# Altium PCB MB1419.PcbDoc (part 1 of 2)
Units mil, origin at the board's own origin, x right, y up, seen from the top; angles counter-clockwise.
Board outline 787.48 x 1614.17 mil, 4 copper layers (Top Layer, Signal Layer 3, Signal Layer 4, Bottom Layer), stack 43.307 mil thick; 117 components, 71 nets, 371 pads, 280 vias.
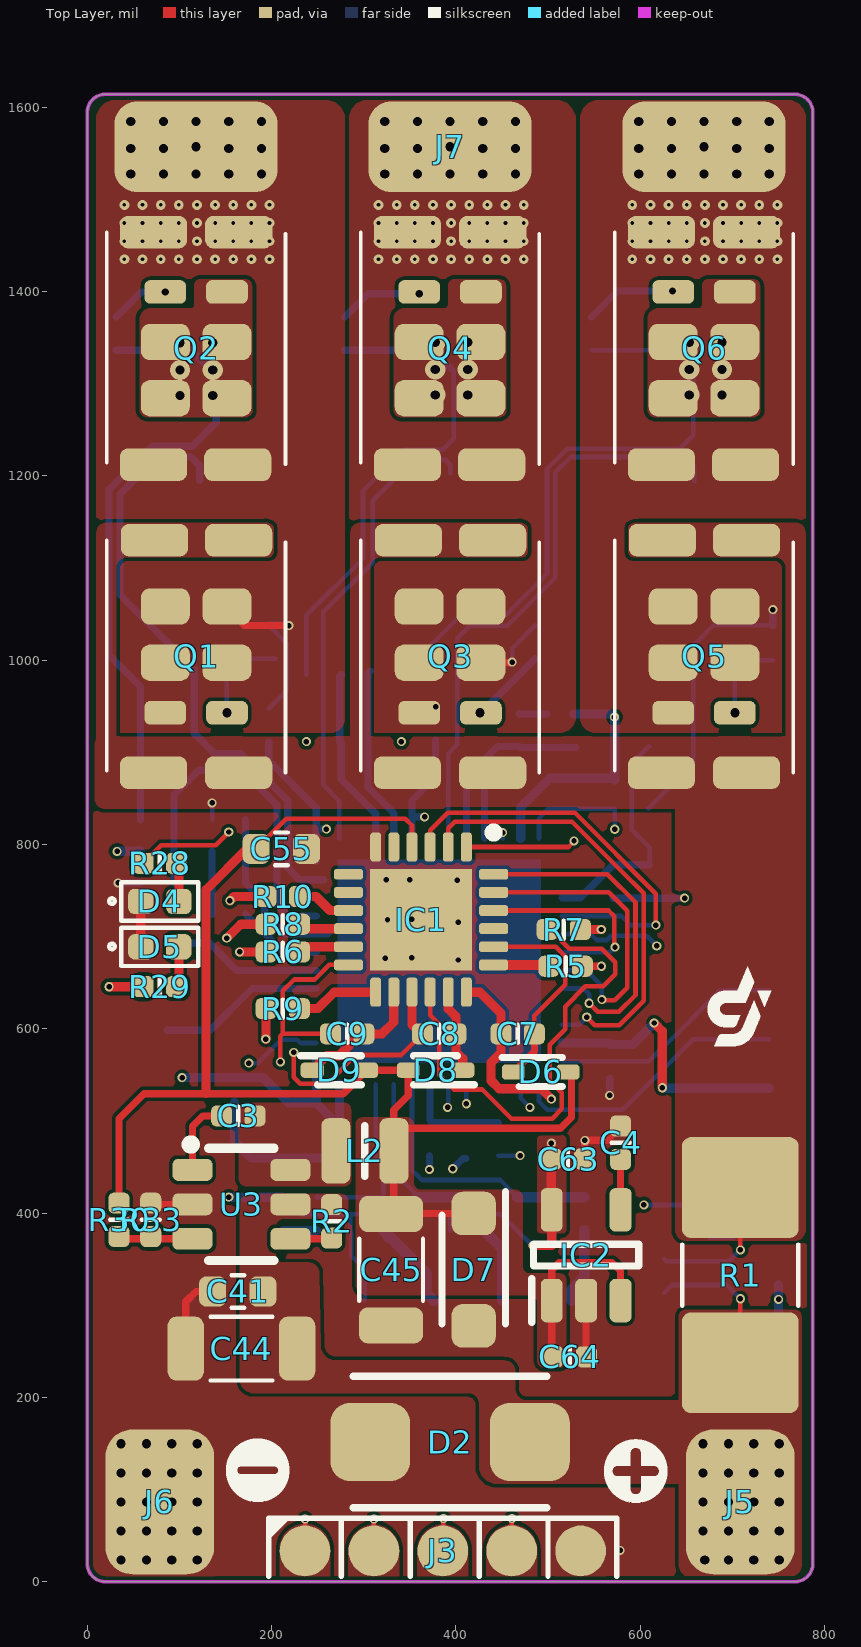
[diagram p0: Top Layer view]
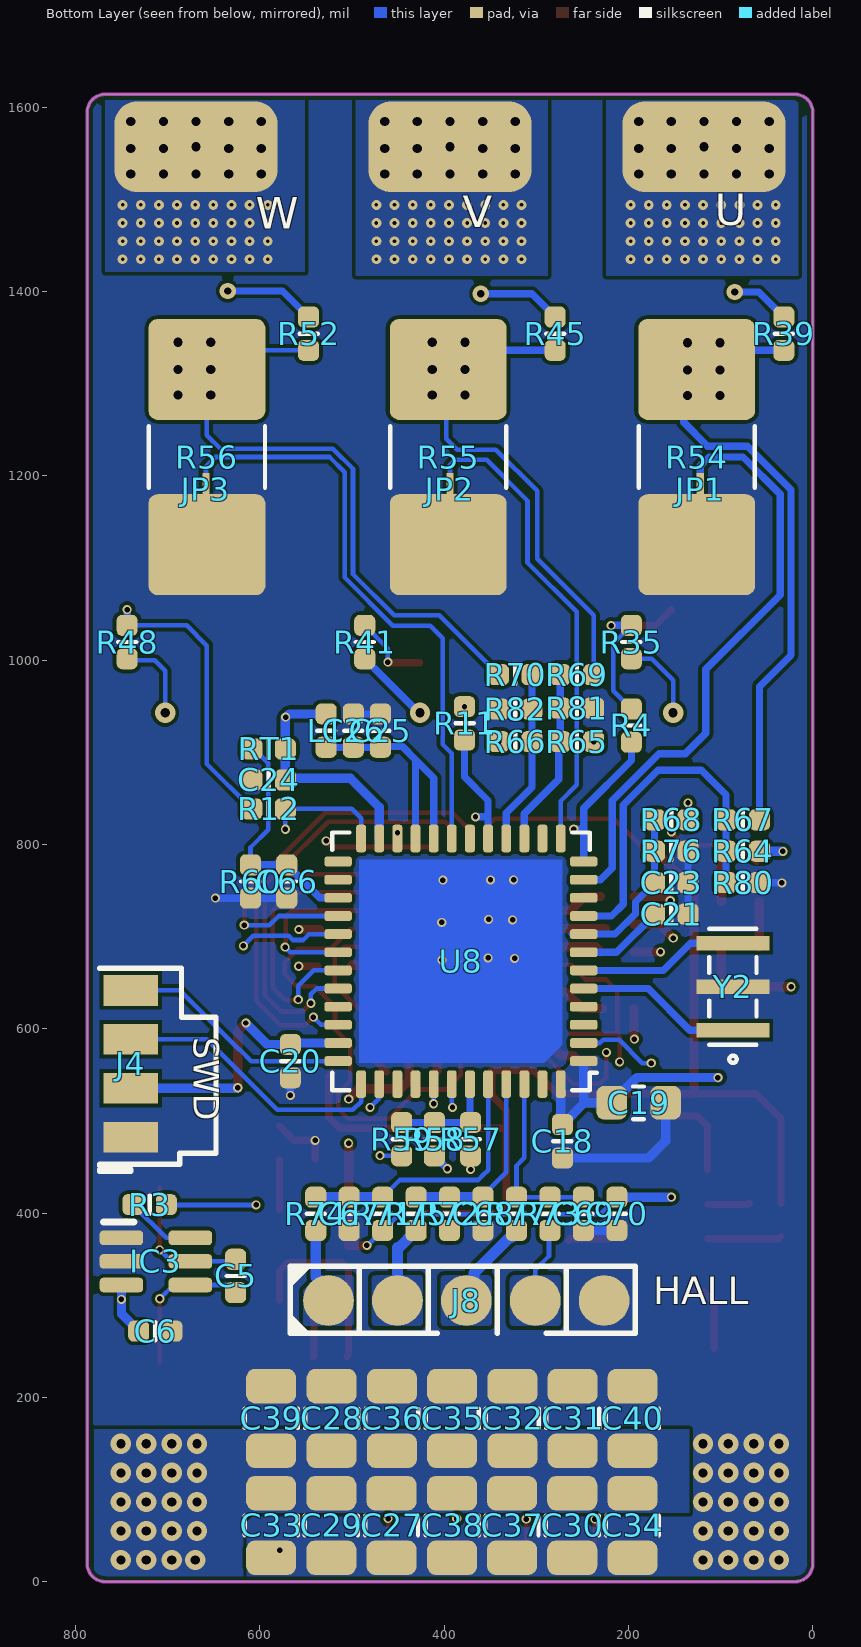
[diagram p1: Bottom Layer view, seen from below]
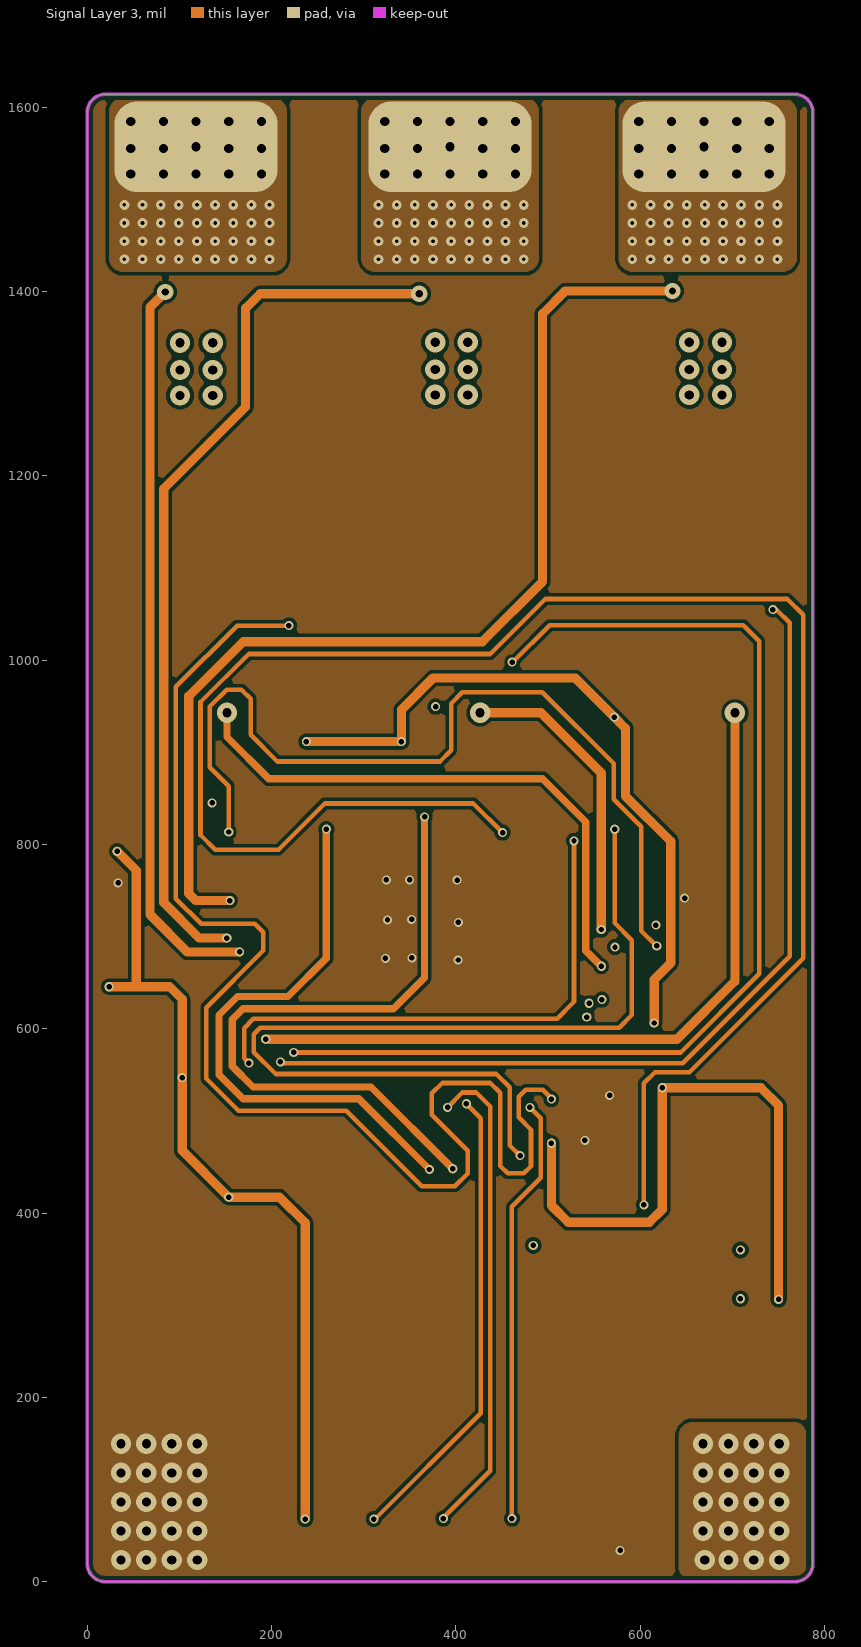
[diagram p2: Signal Layer 3]
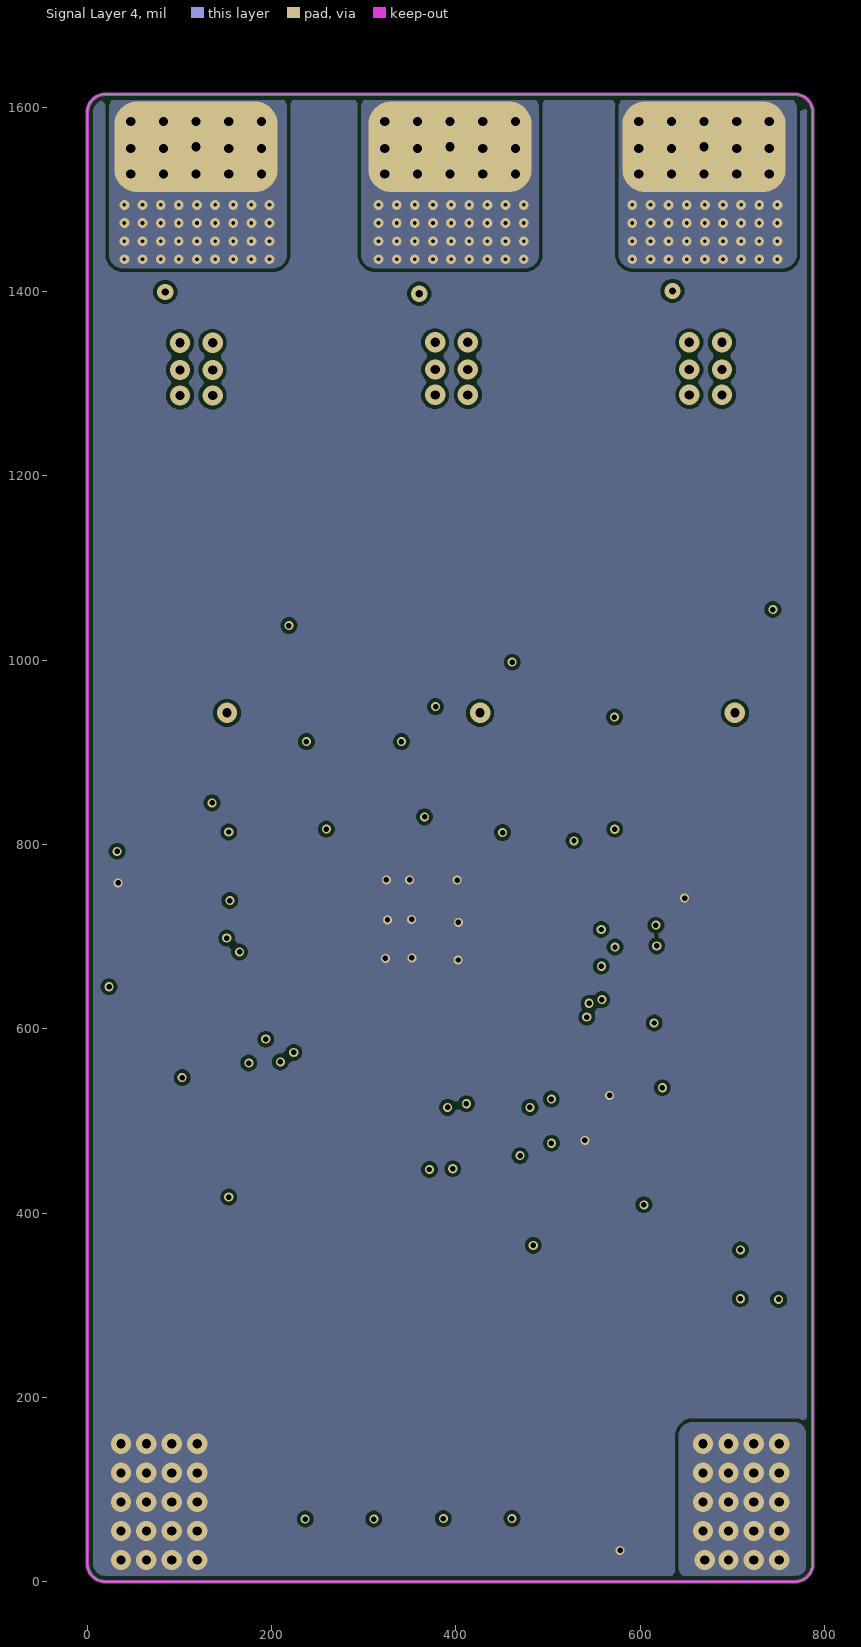
[diagram p3: Signal Layer 4]
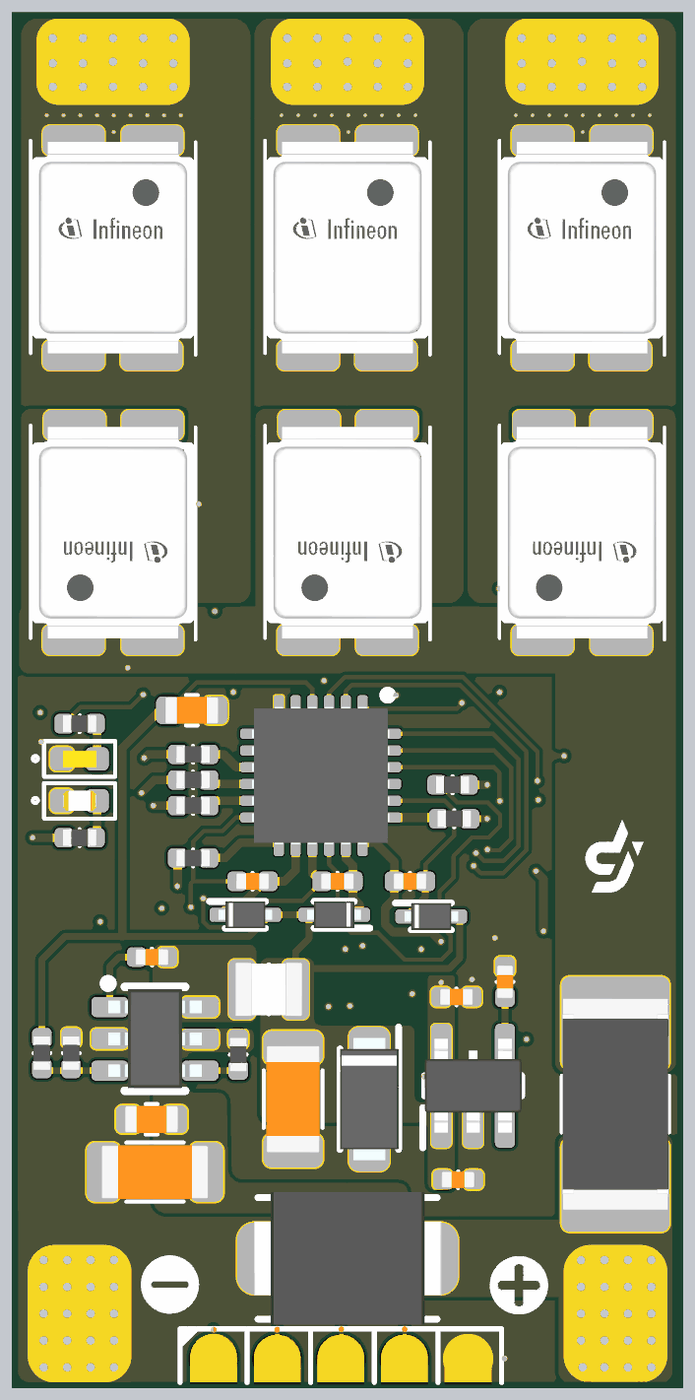
[diagram p5: 3D render of the assembled board from above, using the file's embedded part models]
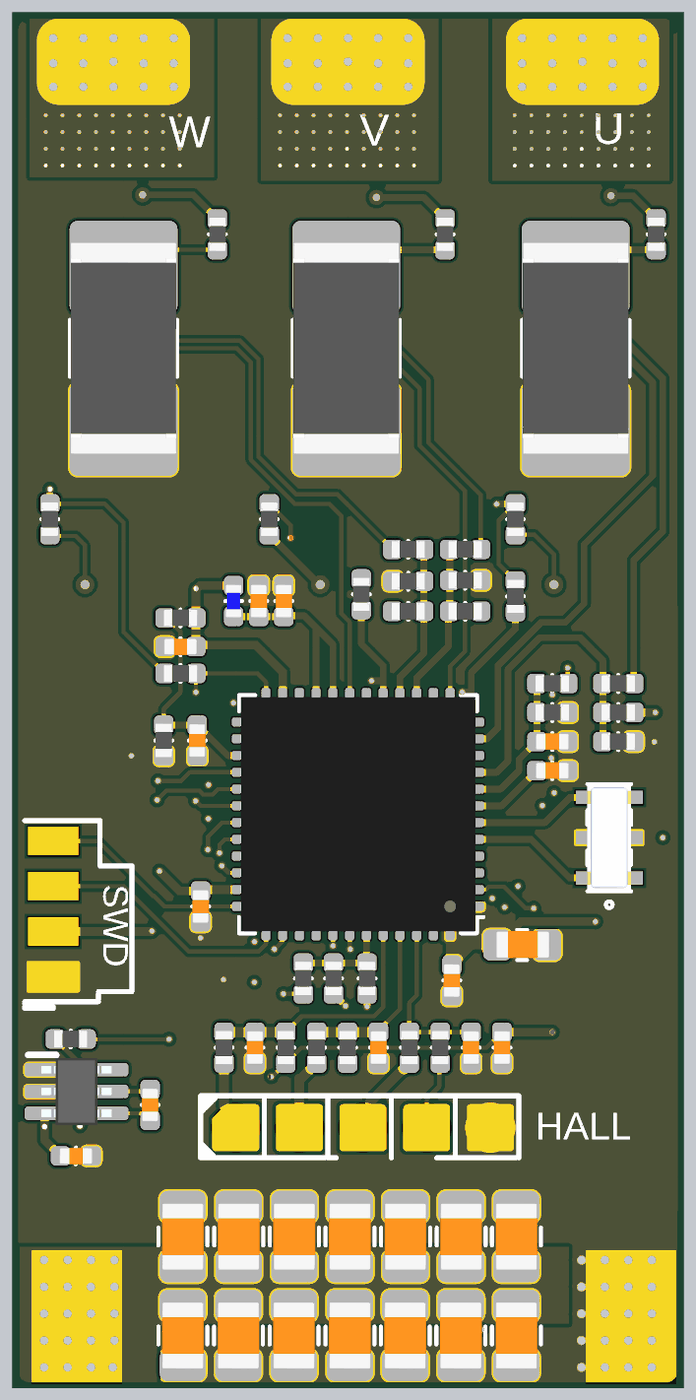
[diagram p6: 3D render of the assembled board from below, using the file's embedded part models]

## Layer stack, top to bottom
Top Solder: solder mask 0.4, Solder Resist, Dk 3.5
Top Layer: signal copper 1.378
Dielectric 1: prepreg 7.0866, Dk 4.5
Signal Layer 3: signal copper 1.378
Dielectric 2: core 23.622, Dk 4.5
Signal Layer 4: signal copper 1.378
Dielectric 3: prepreg 7.0866, Dk 4.5
Bottom Layer: signal copper 1.378
Bottom Solder: solder mask 0.4, Solder Resist, Dk 3.5

## Board outline
0,19.68 0,206.69 -0.07,206.69 -0.07,918.31 0,917.32 0,1594.49 cw(c19.68,1594.49) 19.69,1614.17 767.72,1614.17 cw(c767.72,1594.49) 787.4,1594.49 787.4,19.69 cw(c767.72,19.68) 767.72,0 19.69,0 cw(c19.69,19.68)

## Design rules (kind name [scope] priority, off if disabled: settings)
Clearance Clearance_2 [(ObjectKind = 'Component') And (Name = 'R1')] p1: gap=10 ignorepadtopadclearanceinfootprint=FALSE except(0: Arc-Hole Track-Hole SMDPad-Hole THPad-Hole Via-Hole Fill-Hole Poly-Hole Region-Hole Text-Hole)
Clearance Clearance_1 [(ObjectKind = 'Component') And (Name = 'R1')] p2: gap=10 ignorepadtopadclearanceinfootprint=FALSE except(0: Arc-Hole Track-Hole SMDPad-Hole THPad-Hole Via-Hole Fill-Hole Poly-Hole Region-Hole Text-Hole)
Clearance Clearance_J2 [(ObjectKind = 'Pad') And (Name = 'J2-1') vs InPolygon] p3: gap=11.81 ignorepadtopadclearanceinfootprint=FALSE
Clearance [All] p4: gap=3.94 ignorepadtopadclearanceinfootprint=FALSE
ComponentClearance [All] p1: gap=0 collisioncheckmode=3 verticalgap=0 showdistances=FALSE
HoleToHoleClearance [All] p1: gap=5.91 allowstackedmicrovias=TRUE
MinimumSolderMaskSliver [All] p1: minsoldermaskwidth=3.94
PolygonConnect [All] p1: connectstyle=Direct reliefconductorwidth=10 reliefentries=4 polygonreliefangle="90 Angle" airgapwidth=10
RoutingVias [All] p1: holewidth=5.91 width=9.84 viastyle="Through Hole" minholewidth=3.94 minwidth=8.66 maxholewidth=19.68 maxwidth=27.56
ShortCircuit ShortCircuit_JP1-JP3 [InComponent('JP1', 'JP2', 'JP3') vs InComponent('JP1', 'JP2', 'JP3')] p1: allowed=TRUE
ShortCircuit [All] p2: allowed=FALSE
SolderMaskExpansion [All] p1: expansion=1.5 istentingtop=FALSE
Width [All] p1: maxlimit=196.85 minlimit=4 preferedwidth=7.87
26 further rules are at their usual default settings.

## Classes and differential pairs
component class SENSING: C66 C67 C68 C69 C70 J8 R4 R11 R12 R57 R58 R59 R60 R64 R65 R66 R67 R68 R69 R70 R71 R72 R73 R74 R75 R76 R77 R80 R81 R82 RT1
component class "POWER STAGE": C3 C4 C5 C6 C7 C8 C9 C27 C28 C29 C30 C31 C32 C33 C34 C35 C36 C37 C38 C39 C40 C41 C44 C45 C55 C63 C64 D2 D6 D7 D8 D9 IC1 IC2 IC3 J5 J6 J7 JP1 JP2 JP3 L2 Q1 Q2 Q3 Q4 Q5 Q6 R1 R2 R3 R5 R6 R7 R8 R9 R10 R30 R33 R35 R39 R41 R45 R48 R52 R54 R55 R56 U3
component class MCU: C18 C19 C20 C21 C23 C24 C25 C26 D4 D5 J3 J4 L1 R28 R29 U8 Y2

## Components (designator, comment, footprint, x,y, rotation, side; value= is the part's Value field where it differs from the comment)
C3 "100nf" C_0402 163.9,505.51 r180 top
C4 "1uF" C_0402 578.77,476.38 r90 top
C5 "1nF" C_0402 626.23,331.83 r90 bottom
C6 "100nF" C_0402 713.43,271.91 r0 bottom
C7 "1uF" C_0402 467.09,594.49 r180 top
C8 "1uF" C_0402 381.89,594.49 r180 top
C9 "1uF" C_0402 282.07,594.49 r180 top
C18 "0.1uF" C_0402 271.65,477.95 r270 bottom
C19 "4.7uF" C_0603 188.98,519.68 r0 bottom
C20 "0.1uF" C_0402 566.93,564.9 r270 bottom
C21 "0.1uF" C_0402 153.54,724.41 r180 bottom
C23 "0.1uF" C_0402 153.54,758.53 r180 bottom
C24 "0.1uF" C_0402 590.55,870.08 r0 bottom
C25 "1uF" C_0402 469.14,923.62 r90 bottom
C26 "10nf" C_0402 498.59,923.62 r90 bottom
C27 "15uF" C_0805_HD 457.09,61.02 r90 bottom
C28 "15uF" C_0805_HD 522.07,177.17 r270 bottom
C29 "15uF" C_0805_HD 522.44,61.02 r90 bottom
C30 "15uF" C_0805_HD 261.02,61.02 r90 bottom
C31 "15uF" C_0805_HD 260.65,177.17 r270 bottom
C32 "15uF" C_0805_HD 326.01,177.17 r270 bottom
C33 "15uF" C_0805_HD 587.8,61.02 r90 bottom
C34 "15uF" C_0805_HD 195.67,61.02 r90 bottom
C35 "15uF" C_0805_HD 391.36,177.17 r270 bottom
C36 "15uF" C_0805_HD 456.72,177.17 r270 bottom
C37 "15uF" C_0805_HD 326.38,61.02 r90 bottom
C38 "15uF" C_0805_HD 391.36,61.02 r90 bottom
C39 "15uF" C_0805_HD 587.8,177.17 r270 bottom
C40 "15uF" C_0805_HD 195.67,177.17 r270 bottom
C41 "0.22uF" C_0603_HD 163.39,314.96 r180 top
C44 "10uF" C_1206 167.32,252.95 r180 top
C45 "22uF" C_1206 329.72,338.58 r90 top
C55 "470nF" C_0603_HD 210.63,795.28 r0 top
C63 "1uF" C_0402 521.69,458.66 r0 top
C64 "2.2uF" C_0402 523.62,244.09 r0 top
C66 "10nf" C_0402 570.87,759.84 r270 bottom
C67 "10pF" C_0402 503.06,399.15 r270 bottom
C68 "10pF" C_0402 357.83,399.15 r270 bottom
C69 "10pF" C_0402 248.91,399.15 r270 bottom
C70 "0.1uF" C_0402 212.6,399.15 r270 bottom
D2 "SMBJ30CA" SMBJ50CA 393.7,151.56 r180 top
D4 "LED RED" D_0402_Led_red 78.74,738.19 r0 top
D5 "LNJ347W83RA" D_0402_Led_green 78.74,688.98 r0 top
D6 "SD103AX" SODFL1608X70N 492.11,553.13 r0 top
D7 "SMF8.0A" SODFL3618X108N 419.27,338.6 r270 top
D8 "SD103AX" SODFL1608X70N 377.97,555.13 r180 top
D9 "SD103AX" SODFL1608X70N 273.61,555.1 r0 top
IC1 "FD6288Q" QFN50P400X400X90-25N-D 362.19,718.52 r270 top
IC2 "AP2210K-3.3TRG1" SOT95P280X145-5N 541.34,354.33 r90 top
IC3 "INA199A1DCKR" SOT65P210X110-6N 712.84,347.57 r180 bottom
J3 "PWM" SOLDER_PAD_5PIN_SMD 236.22,33.46 r0 top
J4 "SWD-PAD" SOLDER_PAD_4PIN_rect_SMD 740.16,641.73 r270 bottom
J5 "CON1" wire1_220s 708.66,86.61 r0 top
J6 "CON1" wire1_220s 78.74,86.61 r0 top
J7 "Motor" CONN_MOTOR_OUT 393.7,1557.09 r180 top locked
J8 "SOLDER PAD" SOLDER_PAD_5PIN_SMD 525.59,305.12 r180 bottom
JP1 "Short" SHORT 122.05,1185.17 r270 bottom
JP2 "Short" SHORT 393.7,1185.17 r270 bottom
JP3 "Short" SHORT 658.48,1185.17 r270 bottom
L1 "600 Ohms@100MHz" L_0402 528.04,923.62 r90 bottom
L2 "6.8uH" LQM2MPN1R0NG0L 301.18,467.52 r0 top
Q1 "IRF7480MTRPBF" IRF7480MTRPBF 118.11,1003.94 r90 top locked
Q2 "IRF7480MTRPBF" IRF7480MTRPBF 118.11,1338.58 r270 top locked
Q3 "IRF7480MTRPBF" IRF7480MTRPBF 393.7,1003.94 r90 top locked
Q4 "IRF7480MTRPBF" IRF7480MTRPBF 393.7,1338.58 r270 top locked
Q5 "IRF7480MTRPBF" IRF7480MTRPBF 669.29,1003.94 r90 top locked
Q6 "IRF7480MTRPBF" IRF7480MTRPBF 669.29,1338.58 r270 top locked
R1 "0.003" resc635x300x60l193n 708.64,332.66 r90 top
R2 "100k" R_0402 265.22,390.99 r90 top
R3 "56Ω" R_0402 719.64,409.2 r0 bottom
R4 "10k" R_0402 196.85,929.13 r90 bottom
R5 "33" R_0402 519.1,667.86 r0 top
R6 "33" R_0402 212.2,683.43 r180 top
R7 "33" R_0402 517.16,707.75 r0 top
R8 "33" R_0402 212.2,713.47 r180 top
R9 "33" R_0402 212.2,621.89 r180 top
R10 "33" R_0402 212.2,743.51 r180 top
R11 "10k" R_0402 377.95,931.5 r90 bottom
R12 "10k" R_0402 590.55,838.58 r0 bottom
R28 "510" R_0402 78.74,779.53 r0 top
R29 "510" R_0402 78.74,645.67 r0 top
R30 "90.9K" R_0402 34.45,392.72 r270 top
R33 "10k" R_0402 68.9,392.72 r270 top
R35 "10K" R_0402 196.85,1019.68 r90 bottom
R39 "10K" R_0402 31.5,1354.33 r270 bottom
R41 "10K" R_0402 486.22,1019.68 r90 bottom
R45 "10K" R_0402 279.53,1354.33 r270 bottom
R48 "10K" R_0402 744.09,1019.68 r90 bottom
R52 "10K" R_0402 547.24,1354.33 r270 bottom
R54 "0.003" resc635x300x60l193n 125.98,1220.47 r270 bottom
R55 "0.003" resc635x300x60l193n 395.67,1220.47 r270 bottom
R56 "0.003" resc635x300x60l193n 657.48,1220.47 r270 bottom
R57 "2.2k" R_0402 371.33,480.32 r90 bottom
R58 "2.2k" R_0402 410.7,480.32 r90 bottom
R59 "2.2k" R_0402 446.13,480.32 r90 bottom
R60 "4.7K" R_0402 610.24,759.84 r270 bottom
R64 "22k" r_0402 75.97,792.65 r180 bottom
R65 "22k" r_0402 255.91,911.63 r180 bottom
R66 "22k" r_0402 322.83,911.63 r0 bottom
R67 "1.5k" R_0402 75.97,826.77 r180 bottom
R68 "169k" R_0402 153.54,826.77 r0 bottom
R69 "1.5k" R_0402 255.91,984.25 r180 bottom
R70 "1.5k" R_0402 322.83,984.25 r0 bottom
R71 "10K" R_0402 466.75,399.15 r90 bottom
R72 "10K" R_0402 394.14,399.15 r90 bottom
R73 "10K" R_0402 285.21,399.15 r270 bottom
R74 "1.8k" R_0402 539.37,399.15 r90 bottom
R75 "1.8k" R_0402 430.45,399.15 r90 bottom
R76 "18k" R_0402 153.54,792.65 r180 bottom
R77 "1.8k" R_0402 321.52,399.15 r270 bottom
R80 "2.2k" R_0402 75.97,758.53 r0 bottom
R81 "2.2k" R_0402 255.91,947.94 r0 bottom
R82 "2.2k" R_0402 322.83,946.85 r180 bottom
RT1 "10K" R_0402 590.55,903.72 r0 bottom
U3 "JW5026" SOT-23-6_L2.9-W1.6-P0.95-LS2.8-BR 167.34,409.47 r180 top
U8 "STM32G431" qfn49p50_700x700x60l40x25t560n 381.89,673.23 r90 bottom
Y2 "8Mhz" murata_cstce8m00g15c99-r0 86.61,645.67 r90 bottom

## Footprints (in the part's own frame and the unit in brackets; to place one, negate y for a bottom-side part, rotate by r counter-clockwise, add the part's x,y. Pads: shape width x height; smd on the part's side, far side on the other; paste and mask are expansions set on the pad)
C_0402 [mm] "C_0402"
  rrect52% 0.58x0.58 smd mask+0.05: 1(-0.46,0) 2(0.46,0)
  silkscreen extent 0,-0.25 0,0.25, body extent -0.5,-0.25 0.5,0.25, height 0.55
C_0603 [mm] "C_0603"
  rrect50% 0.84x0.93 smd mask+0.05: 1(-0.745,0) 2(0.745,0)
  silkscreen extent -0.15,-0.45 0.14,0.45, body extent -0.82,-0.41 0.78,0.4, height 0.9
C_0603_HD [mm] "C_0603_HD"
  rrect51% 0.74x0.83 smd mask+0.05: 1(-0.695,0) 2(0.695,0)
  silkscreen extent -0.18,-0.45 0.17,0.45, body extent -0.8,-0.41 0.8,0.41, height 0.9
C_0805_HD [mm] "C_0805_HD"
  rrect51% 0.95x1.38 smd mask+0.05: 1(-0.89,0) 2(0.89,0)
  silkscreen extent -0.26,-0.73 0.27,0.73, body extent -1,-0.63 1,0.63, height 1.4
C_1206 [mm] "C_1206"
  rrect50% 1x1.77 smd mask+0.05: 1(-1.535,0) 2(1.535,0)
  silkscreen extent -0.85,-0.88 0.85,0.88, body extent -1.6,-0.8 1.6,0.8, height 1.27
CONN_MOTOR_OUT [mm] "CONN_MOTOR_OUT"
  rrect50% 4.5x2.5 hole 0.254: 1(-7,0) 2(0,0) 3(7,0)
D_0402_Led_green [mm] "D_0402_LED_GREEN"
  rrect51% 0.7x0.7 smd mask+0.05: A(0.525,0) C(-0.525,0)
  silkscreen extent -1.39,-0.53 1.06,0.53, body extent -0.5,-0.3 0.5,0.3, height 0.08
D_0402_Led_red [mm] "D_0402_LED_RED"
  rrect51% 0.7x0.7 smd mask+0.05: A(0.525,0) C(-0.525,0)
  silkscreen extent -1.39,-0.53 1.06,0.53, body extent -0.5,-0.25 0.5,0.25, height 0.32
IRF7480MTRPBF [mm]
  rrect50% 0.65x1.15 smd: 1(-1.55,-0.85) 6(-1.55,0.85)
  rrect50% 1x1.35 smd: 2(-0.17,-0.85) 3(1.38,-0.85) 4(1.38,0.85) 5(-0.17,0.85)
  rrect50% 0.9x1.85 smd: 7(-3.2,-1.175) 8(-3.2,1.175) 9(3.21,-1.175) 10(3.21,1.147)
  silkscreen extent -3.2,-2.46 3.2,2.46, body extent -3.15,-2.46 3.15,2.46, height 0.7
L_0402 [mm] "L_0402"
  rrect52% 0.58x0.58 smd mask+0.05: 1(0.46,0) 2(-0.46,0)
  silkscreen extent 0,-0.25 0,0.25, body extent -0.5,-0.25 0.5,0.25, height 0.55
LQM2MPN1R0NG0L [mm]
  rrect50% 0.8x1.8 smd: 1(-0.8,0) 2(0.8,0)
  silkscreen extent 0,-0.7 0,0.7, body extent -1,-0.8 1,0.8, height 0.9
murata_cstce8m00g15c99-r0 [mm] "MURATA_CSTCE8M00G15C99-R0"
  rect 0.4x2 smd mask+0.05: 1(-1.2,0) 2(0,0) 3(1.2,0)
  silkscreen extent -2.1,-0.65 1.6,0.65, body extent -1.6,-0.65 1.6,0.65, height 0.7
qfn49p50_700x700x60l40x25t560n [mm] "QFN49P50_700X700X60L40X25T560N"
  rrect52% 0.27x0.76 smd mask+0.05: 1(-2.75,-3.385) 2(-2.25,-3.385) 3(-1.75,-3.385) 4(-1.25,-3.385) 5(-0.75,-3.385) 6(-0.25,-3.385) 7(0.25,-3.385) 8(0.75,-3.385) 9(1.25,-3.385) 10(1.75,-3.385) 11(2.25,-3.385) 12(2.75,-3.385) 25(2.75,3.385) 26(2.25,3.385) 27(1.75,3.385) 28(1.25,3.385) 29(0.75,3.385) 30(0.25,3.385) 31(-0.25,3.385) 32(-0.75,3.385) 33(-1.25,3.385) 34(-1.75,3.385) 35(-2.25,3.385) 36(-2.75,3.385)
  rrect52% 0.76x0.27 smd mask+0.05: 13(3.385,-2.75) 14(3.385,-2.25) 15(3.385,-1.75) 16(3.385,-1.25) 17(3.385,-0.75) 18(3.385,-0.25) 19(3.385,0.25) 20(3.385,0.75) 21(3.385,1.25) 22(3.385,1.75) 23(3.385,2.25) 24(3.385,2.75) 37(-3.385,2.75) 38(-3.385,2.25) 39(-3.385,1.75) 40(-3.385,1.25) 41(-3.385,0.75) 42(-3.385,0.25) 43(-3.385,-0.25) 44(-3.385,-0.75) 45(-3.385,-1.25) 46(-3.385,-1.75) 47(-3.385,-2.25) 48(-3.385,-2.75)
  oct 0.025x0.025 smd mask+0.05: 49(0,0)
  Top Layer region: -2.8,2.8 -2.8,-2.3 -2.3,-2.8 2.8,-2.8 2.8,2.8 -2.8,2.8
  silkscreen extent -3.55,-3.74 3.55,3.55, body extent -3.51,-3.51 3.51,3.51, height 0.78
QFN50P400X400X90-25N-D [mm]
  rrect50% 0.8x0.3 smd: 1(-2,1.25) 2(-2,0.75) 3(-2,0.25) 4(-2,-0.25) 5(-2,-0.75) 6(-2,-1.25) 13(2,-1.25) 14(2,-0.75) 15(2,-0.25) 16(2,0.25) 17(2,0.75) 18(2,1.25)
  rrect50% 0.3x0.8 smd: 7(-1.25,-2) 8(-0.75,-2) 9(-0.25,-2) 10(0.25,-2) 11(0.75,-2) 12(1.25,-2) 19(1.25,2) 20(0.75,2) 21(0.25,2) 22(-0.25,2) 23(-0.75,2) 24(-1.25,2)
  rect 2.8x2.8 smd: 25(0,0)
  silkscreen extent -2.52,1.88 -2.28,2.13, body extent -2.05,-2.05 2.05,2.05, height 0.9
R_0402 [mm] "R_0402"
  rrect52% 0.58x0.58 smd mask+0.05: 1(-0.46,0) 2(0.46,0)
  silkscreen extent 0,-0.25 0,0.25, body extent -0.5,-0.25 0.5,0.25, height 0.4
r_0402 [mm] "R_0402"
  rrect52% 0.58x0.58 smd mask+0.05: 1(-0.46,0) 2(0.46,0)
  silkscreen extent 0,-0.25 0,0.25, body extent -0.5,-0.25 0.5,0.25, height 0.4
resc635x300x60l193n [mm] "RESC635X300X60L193N"
  rrect18% 2.78x3.22 smd mask+0.05: 1(-2.415,0) 2(2.415,0)
  silkscreen extent -0.84,-1.6 0.84,1.6, body extent -3.15,-1.58 3.15,1.58, height 0.7
SHORT [mm] "SHORT"
  rect 0.462x0.2 smd: 1(-0.226,0) 2(0.201,0)
SMBJ50CA [mm]
  rrect50% 2.2x2.15 smd: 1(-2.2,0) 2(2.2,0)
  silkscreen extent -2.68,-1.81 2.68,1.81, body extent -2.8,-1.97 2.8,1.97, height 2.65
SODFL1608X70N [mm]
  rrect50% 0.64x0.42 smd: A(0.75,0) C(-0.75,0)
  silkscreen extent -1.07,-0.4 0.6,0.4, body extent -0.8,-0.4 0.8,0.4, height 0.7
SODFL3618X108N [mm]
  rrect50% 1.2x1.22 smd: A(1.55,0) C(-1.55,0)
  silkscreen extent -2.15,-0.87 1.5,0.87, body extent -1.83,-0.87 1.83,0.87, height 1.08
SOLDER_PAD_4PIN_rect_SMD [mm] "SOLDER_PAD_4PIN_RECT_SMD"
  rect 0.85x1.5 smd paste-100 mask+0.05: 1(0,0) 2(1.35,0) 3(2.7,0) 4(4.05,0)
SOLDER_PAD_5PIN_SMD [mm] "SOLDER_PAD_5PIN_SMD"
  round 1.4 smd paste-2.54 mask+0.05: 1(0,0) 2(1.9,0) 3(3.8,0) 4(5.7,0) 5(7.6,0)
SOT65P210X110-6N [mm]
  rrect50% 1.2x0.4 smd: 1(-0.95,0.65) 2(-0.95,0) 3(-0.95,-0.65) 4(0.95,-0.65) 5(0.95,0) 6(0.95,0.65)
  silkscreen extent -1.44,1.09 -0.61,1.09, body extent -1.05,-1 1.05,1, height 1.1
SOT95P280X145-5N [mm]
  rrect50% 1.2x0.6 smd: 1(-1.25,0.95) 2(-1.25,0) 3(-1.25,-0.95) 4(1.25,-0.95) 5(1.25,0.95)
  silkscreen extent -1.85,-1.45 0.3,1.5, body extent -1.4,-1.45 1.4,1.45, height 1.2
SOT-23-6_L2.9-W1.6-P0.95-LS2.8-BR [mm]
  rrect50% 1.1x0.6 smd paste+0 mask+0.051: 1(1.35,-0.95) 2(1.35,0) 3(1.35,0.95) 4(-1.35,0.95) 5(-1.35,0) 6(-1.35,-0.95)
  silkscreen extent -0.9,-1.78 1.52,1.55, body extent -1.4,-1.48 1.4,1.48, height 1.45
wire1_220s [mm] "WIRE1_220S"
  rrect50% 3x4 smd paste-100 mask+0.05: 1(0,0)

## Part data
C3: library part CAP_Dup1, "CAP CER 3900PF 16V X7R 0402", Dielectric Type=Capacitors, Manufacturer=KEMET, Manufacturer PN=C0402C392K4RAC7867, Package Size="0402 (1005 Metric)", Rated Voltage=16V, Temperature Coefficient=X7R, Tolerance=10%, CLASS=DISCRETE, PART_NUMBER=TMP-419
C4 C25 C63: library part CAP_Dup1, "CAP CER 1UF 25V X5R 0402", Dielectric Type=Capacitors, Manufacturer="Murata Electronics North America", Manufacturer PN=GRM155R61E105KA12D, Package Size="0402 (1005 Metric)", Rated Voltage=25V, Temperature Coefficient=X5R, Tolerance=10%, CLASS=DISCRETE, PART_NUMBER=CAP-00000006
C5 C6 C7 C8 C9 C67 C68 C69: library part CAP, "CAP CER 10PF 10V C0G/NP0 0402", Dielectric Type=Capacitors, Manufacturer="Wurth Electronics Inc.", Manufacturer PN=885012005007, Package Size="0402 (1005 Metric)", Rated Voltage=10V, Temperature Coefficient="C0G, NP0", Tolerance=5%, CLASS=DISCRETE, PART_NUMBER=TMP-395
C18 C20 C21 C23 C24: library part CAP_Dup1, "CAP CER 0.1UF 16V X7R 0402", Dielectric Type=Capacitors, Manufacturer="Wurth Electronics Inc.", Manufacturer PN=885012205037, Package Size="0402 (1005 Metric)", Rated Voltage=16V, Temperature Coefficient=X7R, Tolerance=10%, CLASS=DISCRETE, PART_NUMBER=CAP-00000053
C19: library part CAP_Dup1, "CAP CER 4.7UF 10V X5R 0603", Dielectric Type=Capacitors, Manufacturer="Wurth Electronics Inc.", Manufacturer PN=885012106012, Package Size="0603 (1608 Metric)", Rated Voltage=10V, Temperature Coefficient=X5R, Tolerance=20%, CLASS=DISCRETE, PART_NUMBER=TMP-414
C26: library part CAP_Dup1, "CAP CER 10000PF 16V X7R 0402", Dielectric Type=Capacitors, Manufacturer="Wurth Electronics Inc.", Manufacturer PN=885012205031, Package Size="0402 (1005 Metric)", Rated Voltage=16V, Temperature Coefficient=X7R, Tolerance=10%, CLASS=DISCRETE, PART_NUMBER=TMP-422
C27 C28 C29 C30 C31 C32 C33 C34 C35 C36 C37 C38 C39 C40: library part CAP_Dup1, "CAP CER 15UF 35V X5R 0805", Dielectric Type=Capacitors, Manufacturer="TDK Corporation", Manufacturer PN=C2012X5R1V156M125AC, Package Size="0805 (2012 Metric)", Rated Voltage=35V, Temperature Coefficient=X5R, Tolerance=20%, ALT_SYMBOLS=C_0805_hd, CLASS=DISCRETE, PART_NUMBER=TMP-773
C41: library part CAP_Dup1, "CAP CER 0.22UF 50V X7R 0603", Dielectric Type=Capacitors, Manufacturer="TDK Corporation", Manufacturer PN=CGA3E3X7R1H224K080AD, Package Size="0603 (1608 Metric)", Rated Voltage=50V, Temperature Coefficient=X7R, Tolerance=10%, ALT_SYMBOLS=c_0603_hd, CLASS=DISCRETE, PART_NUMBER=TMP-138
C44: library part CAP_Dup1, "CAP CER 10UF 50V X7R 1206", Dielectric Type=Capacitors, Manufacturer="Samsung Electro-Mechanics America, Inc.", Manufacturer PN=CL31B106KBHNNNE, Package Size="1206 (3216 Metric)", Rated Voltage=50V, Temperature Coefficient=X7R, Tolerance=10%, CLASS=DISCRETE, PART_NUMBER=CAP-00000016
C45: library part CAP_Dup1, "CAP CER 22UF 25V X5R 1206", Dielectric Type=Capacitors, Manufacturer="Murata Electronics North America", Manufacturer PN=GRT31CR61E226ME01L, Package Size="1206 (3216 Metric)", Rated Voltage=25V, Temperature Coefficient=X5R, Tolerance=20%, CLASS=DISCRETE, PART_NUMBER=TMP-421
C55: library part CAP_Dup1, "CAP CER 0.47UF 25V X7R 0603", Dielectric Type=Capacitors, Manufacturer="Wurth Electronics Inc.", Manufacturer PN=885012206075, Package Size="0603 (1608 Metric)", Rated Voltage=25V, Temperature Coefficient=X7R, Tolerance=10%, ALT_SYMBOLS=c_0603_hd, CLASS=DISCRETE, PART_NUMBER=TMP-428
C64: library part CAP_Dup1, "CAP CER 2.2UF 10V X5R 0402", Dielectric Type=Capacitors, Manufacturer="Wurth Electronics Inc.", Manufacturer PN=885012105013, Package Size="0402 (1005 Metric)", Rated Voltage=10V, Temperature Coefficient=X5R, Tolerance=20%, CLASS=DISCRETE, PART_NUMBER=TMP-449
C66: library part CAP_Dup1, "CAP CER 10000PF 10V X7R 0402", Dielectric Type=Capacitors, Manufacturer="Wurth Electronics Inc.", Manufacturer PN=885012205012, Package Size="0402 (1005 Metric)", Rated Voltage=10V, Temperature Coefficient=X7R, Tolerance=10%, CLASS=DISCRETE, PART_NUMBER=CAP-00000003
C70: library part CAP_4, "CAP CER 0.1UF 16V X7R 0402", Dielectric Type=Capacitors, Manufacturer="Wurth Electronics Inc.", Manufacturer PN=885012205037, Package Size="0402 (1005 Metric)", Rated Voltage=16V, Temperature Coefficient=X7R, Tolerance=10%, CLASS=DISCRETE, PART_NUMBER=CAP-00000053
D2: "TVS Diode (Bi-directional)", Manufacturer_Name=STMicroelectronics, Datasheet Link=http://www.st.com/web/en/resource/technical/document/datasheet/CD00001366.pdf, Height=2.65mm, Manufacturer_Part_Number=SMBJ30CA
D4: library part LED, "DIO, Rectangle with Flat Top, 1.00mm x 0.50mm, VLMS1500-GS08, 20mA, --, --, 0402 (1005 Metric)", Manufacturer="Vishay Semiconductor Opto Division", Manufacturer PN=VLMS1500-GS08, Package Size="0402 (1005 Metric)", CLASS=DISCRETE, PART_NUMBER=DIO-00000003
D5: library part LED, "LED GREEN 0402 SMD", Manufacturer="Panasonic Electronic Components", Package Size="0402 (1005 Metric)", CLASS=DISCRETE, Manufacturer PN=LNJ347W83RA, PART_NUMBER=TMP-187
D6 D7 D8 D9: library part DIODE_SCHOTTKY_0, "DIODE SCHOTTKY 20V 1A STMITEFLAT", Manufacturer=STMicroelectronics, Manufacturer PN=STPS1L20MF, Package Size=DO-222AA, Rated Voltage="430mV @ 1A", CLASS=DISCRETE, PART_NUMBER=TMP-380
IC1: "Integrated Circuit", Manufacturer_Name="Fortior Tech", Datasheet Link=https://datasheet.lcsc.com/szlcsc/1811131655_Fortior-Tech-FD6288Q_C328453.pdf, Height=0.9mm, Manufacturer_Part_Number=FD6288Q
IC2: "Integrated Circuit", Manufacturer_Name="Diodes Inc.", Mouser Part Number=621-AP2210K-3.3TRG1, Arrow Part Number=AP2210K-3.3TRG1, Arrow Price/Stock=https://www.arrow.com/en/products/ap2210k-3.3trg1/diodes-incorporated?region=asia, Datasheet Link=https://datasheet.datasheetarchive.com/originals/distributors/Datasheets_SAMA/11c7b06ddc65ce3f1395e62eca004054.pdf, Height=1.45mm, Manufacturer_Part_Number=AP2210K-3.3TRG1, Mouser Price/Stock=https://www.mouser.co.uk/ProductDetail/Diodes-Incorporated/AP2210K-3.3TRG1?qs=x6A8l6qLYDB6QE%252Bu0QG50A%3D%3D
IC3: "Integrated Circuit", Manufacturer_Name="Texas Instruments", Mouser Part Number=595-INA199A1DCKR, Arrow Part Number=INA199A1DCKR, Arrow Price/Stock=https://www.arrow.com/en/products/ina199a1dckr/texas-instruments?region=nac, Datasheet Link=http://www.ti.com/lit/ds/symlink/ina199.pdf, Height=1.1mm, Manufacturer_Part_Number=INA199A1DCKR, Mouser Price/Stock=https://www.mouser.co.uk/ProductDetail/Texas-Instruments/INA199A1DCKR?qs=v3hU%2FV0XOahkyIKIBScY5Q%3D%3D
J3 J8: library part CON5, "SOLDER PADS"
J4: library part CON4, "SOLDER PADS"
J5 J6: "SOLDER PADS"
J7: library part CON3, "SOLDER PADS"
JP1 JP2 JP3: library part SHORT, "2 PIN SHORTED TO CONNECT DIFFERENT NETS", CLASS=DISCRETE, PART_NUMBER=TMP-442
L1: library part IND_FB, "FERRITE BEAD 600 OHM 0402 1LN", Manufacturer="Murata Electronics North America", Manufacturer PN=BLM15BX601SN1D, Package Size="0402 (1005 Metric)", CLASS=DISCRETE, PART_NUMBER=TMP-492
L2: library part IND, "Fixed Inductors LPS4018 Low Profile 33uH 0.8A 20% SMD", Manufacturer=Coilcraft, Manufacturer PN=LPS4018-333MRB, Package Size=3.9x3.9x1.7, Tolerance=20%, CLASS=DISCRETE, PART_NUMBER=TMP-377
Q1 Q2 Q3 Q4 Q5 Q6: library part MOSFET_N, "N-channel 60 V, 1.9 mO typ., 120 A STripFET™ F7", Manufacturer=STMicroelectronics, Manufacturer PN=STL180N6F7, Package Size="PowerFLAT 5x6", Rated Voltage=60V, CLASS=DISCRETE, PART_NUMBER=TMP-772
R1 R54 R55 R56: library part RES, "RES 0.003 OHM 1% 3W 2512", Manufacturer="TE Connectivity Passive Product", Manufacturer PN=TLR3A30DR003FTDG, Package Size="2512 (6432 Metric)", Rated Power=3W, Temperature Coefficient=50ppm/C, Tolerance=1%, CLASS=DISCRETE, PART_NUMBER=TMP-766
R2: library part RES, "RES SMD 34.8K OHM 1% 1/16W 0402", Manufacturer=Yageo, Manufacturer PN=RC0402FR-0734K8L, Package Size="0402 (1005 Metric)", Rated Power="0.063W, 1/16W", Temperature Coefficient=100ppm/C, Tolerance=1%, CLASS=DISCRETE, PART_NUMBER=TMP-415
R3: library part RES, "RES SMD 30.9K OHM 1% 1/10W 0402", Manufacturer="Panasonic Electronic Components", Manufacturer PN=ERJ-2RKF3092X, Package Size="0402 (1005 Metric)", Rated Power="0.1W, 1/10W", Temperature Coefficient=100ppm/C, Tolerance=1%, CLASS=DISCRETE, PART_NUMBER=TMP-448
R4 R11 R12 R57 R58 R59 R80 R81 R82: library part RES, "RES SMD 2.2K OHM 1% 1/16W 0402", Manufacturer=Yageo, Manufacturer PN=RC0402FR-072K2L, Package Size="0402 (1005 Metric)", Rated Power="0.063W, 1/16W", Temperature Coefficient=100ppm/C, Tolerance=1%, CLASS=DISCRETE, PART_NUMBER=TMP-444
R5 R6 R7 R8 R9 R10: library part RES, "RES SMD 33 OHM 1% 1/16W 0402", Manufacturer=Yageo, Manufacturer PN=RC0402FR-07120RL, Package Size="0402 (1005 Metric)", Rated Power="0.063W, 1/16W", Temperature Coefficient=100ppm/C, Tolerance=1%, CLASS=DISCRETE, PART_NUMBER=TMP-441
R28 R29: library part RES, "RES SMD 510 OHM 1% 1/16W 0402", Manufacturer=Yageo, Manufacturer PN=RC0402FR-07510RL, Package Size="0402 (1005 Metric)", Rated Power="0.063W, 1/16W", Temperature Coefficient=100ppm/C, Tolerance=1%, CLASS=DISCRETE, PART_NUMBER=TMP-438
R30 R60: library part RES, "RES SMD 4.7K OHM 1% 1/16W 0402", Manufacturer="TE Connectivity Passive Product", Manufacturer PN=CRG0402F4K7, Package Size="0402 (1005 Metric)", Rated Power="0.063W, 1/16W", Temperature Coefficient=100ppm/C, Tolerance=1%, CLASS=DISCRETE, PART_NUMBER=TMP-403
R33: library part RES, "RES SMD 300 OHM 1% 1/16W 0402", Manufacturer=Yageo, Manufacturer PN=RC0402FR-07300RL, Package Size="0402 (1005 Metric)", Rated Power="0.063W, 1/16W", Temperature Coefficient=100ppm/C, Tolerance=1%, CLASS=DISCRETE, PART_NUMBER=TMP-418
R35 R39 R41 R45 R48 R52 R71 R72 R73: library part RES, "RES SMD 10K OHM 1% 1/16W 0402", Manufacturer=Yageo, Manufacturer PN=RC0402FR-0710KL, Package Size="0402 (1005 Metric)", Rated Power="0.063W, 1/16W", Temperature Coefficient=100ppm/C, Tolerance=1%, CLASS=DISCRETE, PART_NUMBER=TMP-396
R64 R65 R66: library part RES, "RES SMD 22K OHM 1% 1/10W 0402", Manufacturer="Panasonic Electronic Components", Manufacturer PN=ERJ-2RKF2202X, Package Size="0402 (1005 Metric)", Rated Power="0.1W, 1/10W", Temperature Coefficient=100ppm/C, Tolerance=1%, CLASS=DISCRETE, PART_NUMBER=TMP-751
R67 R69 R70: library part RES, "RES SMD 1.5K OHM 1% 1/16W 0402", Manufacturer=Yageo, Manufacturer PN=RC0402FR-071K5L, Package Size="0402 (1005 Metric)", Rated Power="0.063W, 1/16W", Temperature Coefficient=100ppm/C, Tolerance=1%, CLASS=DISCRETE, PART_NUMBER=TMP-393
R68: library part RES, "RES SMD 169K OHM 1% 1/16W 0402", Manufacturer=Yageo, Manufacturer PN=RC0402FR-07169KL, Package Size="0402 (1005 Metric)", Rated Power="0.063W, 1/16W", Temperature Coefficient=100ppm/C, Tolerance=1%, CLASS=DISCRETE, PART_NUMBER=TMP-424
R74 R75 R77: library part RES, "RES SMD 1.8K OHM 1% 1/16W 0402", Manufacturer=Yageo, Manufacturer PN=RC0402FR-071K8L, Package Size="0402 (1005 Metric)", Rated Power="0.063W, 1/16W", Temperature Coefficient=100ppm/C, Tolerance=1%, CLASS=DISCRETE, PART_NUMBER=TMP-394
R76: library part RES, "RES SMD 18K OHM 1% 1/16W 0402", Manufacturer=Yageo, Manufacturer PN=RC0402FR-0718KL, Package Size="0402 (1005 Metric)", Rated Power="0.063W, 1/16W", Temperature Coefficient=100ppm/C, Tolerance=1%, CLASS=DISCRETE, PART_NUMBER=TMP-425
RT1: library part NTC, "NTC THERMISTOR 10K OHM 1% 0402", Manufacturer="TDK Corporation", Manufacturer PN=NTCG103JF103FT1, Package Size="0402 (1005 Metric)", CLASS=DISCRETE, PART_NUMBER=TMP-423
U3: Input Voltage=-, JLCPCB Part Class="Extended Part", LCSC Part Name=降压型, Manufacturer=Joulwatt(杰华特), Add into BOM=yes, Convert to PCB=yes, Datasheet=https://atta.szlcsc.com/upload/public/pdf/source/20180404/C185109_F816213DAA4C443FF7F4B914D7806D86.pdf, Device=JW5026, Function=降压型, Manufacturer Part=JW5026, Name=JW5026, Number of Outputs=-, Output Current (Max)=-, Supplier=LCSC, Supplier Footprint=SOT-23-6, Supplier Part=C185109, Switching Frequency=-, Symbol=JW5026, Synchronous Rectification=-, Topology=-
U8: library part STM32_LQFP64_6
Y2: library part resonator, "CER RES 8.0000MHZ 33PF SMD", Frequency Stability=0.13%, Frequency Tolerance=0.1%, Manufacturer="Murata Electronics North America", Manufacturer PN=CSTCE8M00G15C99-R0, Package Size="0.126\" L x 0.051\" W (3.20mm x 1.30mm)", CLASS=DISCRETE, PART_NUMBER=TMP-382

## Via types
v1: diameter 10.63, hole 3.94, Top Layer to Bottom Layer, tented both sides, 108 vias
v2: diameter 22/22/22/22 (per signal layer), hole 10, Top Layer to Bottom Layer, tented both sides, 100 vias
v3: diameter 9.84, hole 5.91, Top Layer to Bottom Layer, tented both sides, 66 vias
v4: diameter 22, hole 10, Top Layer to Bottom Layer, tented both sides, 3 vias
v5: diameter 17.72, hole 7.87, Top Layer to Bottom Layer, tented both sides, 3 vias

## Nets (pads, with @x,y where several pads share a name; then routed paths per layer and width w, separated by ;. In a path a pad name is that pad's centre, name@x,y a point inside that pad or via, vN(x,y) a via of type N, cw(c..) or ccw(c..) an arc to the next point about the centre after c; other vN are vias at no path point)
+3.3V: C6.2 C18.1 C19.2 C20.1 C24.1 C63.1 C70.1 IC2.5 IC3.3 J3.1 J4.3 J8.4 L1.1 R29.1 R64.2 R65.2 R66.2 R71.1 R72.1 R73.2 RT1.1 U8.1 U8.23 U8.35 U8.48 | length 3964.3
  Top Layer w5: J3.1@236.22,33.46 236.48,33.72 v3(236.48,67.98)
  Top Layer w10: v3(23.62,645.67) R29.1@60.63,645.67 ; v3(484,365) 503.94,365 IC2.5@503.94,403.54 ; IC2.5@503.57,403.91 C63.1@503.57,458.66 503.57,475.67 v3(503.7,475.8) ; v3(615.2,606.28) 624,597.48 v3(624,536)
  Signal Layer 3 w10: v3(32.43,792.62) 53.12,771.94 53.12,645.67 v3(23.62,645.67) 89.33,645.67 103,632 v3(103,547) 103,467.87 v3(153.54,417.32) 208.66,417.32 236.48,389.51 v3(236.48,67.98) ; v3(237.8,911.63) v3(340.94,911.63) 340.94,946.34 375.2,980.6 529.7,980.6 v3(572.07,938.23) 583.97,926.32 583.97,852.59 633.11,803.45 633.11,671.37 615.2,653.46 v3(615.2,606.28) ; v3(503.7,475.8) 503.7,408.3 522,390 610,390 624,404 v3(624,536) 731,536 750.24,516.76 v3(750.24,306.3)
  Bottom Layer w5: v3(153.54,417.32) v3@153.61,417.26 ; C70.1@212.6,417.26 230.96,398.89 285.21,398.89 ; J8.4@301.18,305.12 301.18,338.62 286.3,353.5 286.3,379.95 R73.2@285.21,381.04 285.21,398.89 ; R72.1@394.14,381.04 394.14,398.14 394.89,398.89 448.9,398.89 R71.1@466.75,381.04 482.79,365 v3(484,365) ; 394.14,398.89 285.21,398.89
  Bottom Layer w10: v3(32.43,792.62) R64.2@57.86,792.65 ; v3(103,547) 102.61,547 102.36,547.24 190.75,547.24 C19.2@218.31,519.68 248.03,519.68 ; v3@153.61,417.26 C70.1@212.6,417.26 ; U8.1@248.62,564.96 248.62,520.28 248.03,519.68 ; U8.48@273.62,539.96 273.62,498.03 C18.1@271.65,496.06 248.03,519.68 ; U8.23@470.47,806.5 470.47,840.55 501.76,871.84 570.68,871.84 C24.1@572.44,870.08 RT1.1@572.44,903.72 v3@572.44,937.86 ; U8.35@515.16,584.65 C20.1@566.93,584.65 ; L1.1@528.04,941.73 568.03,941.73 v3@571.71,938.05 ; C20.1@566.93,583.01 591.93,583.01 v3(615.2,606.28) ; v3(624,536) 624.57,535.43 J4.3@740.16,535.43 ; C6.2@731.54,271.91 750.24,290.62 v3(750.24,306.3) IC3.3@750.24,321.98
+10V: C45.2 C55.1 C64.1 D6.A D7.C D8.A D9.A IC1.4 IC2.1 IC2.3 L2.2 R30.1 | length 1663.2
  Top Layer w5: C55.1@183.27,795.28 215.99,828 345,828 352.35,820.65 IC1.4@352.35,797.26
  Top Layer w7.87: R30.1@34.45,410.83 34.45,502.45 61.61,529.61 277.64,529.61 D9.A@303.13,555.1 ; D9.A@303.13,555.1 D8.A@348.44,555.13 348.44,527.56 332.68,511.79 332.68,488.9 L2.2@332.68,467.52 ; C45.2@329.72,399.02 C45.2@330.33,399.63 ; D7.C@419.27,399.63 C45.2@330.33,399.63 ; IC2.1@503.94,305.12 503.94,245.67 C64.1@505.51,244.09 ; IC2.1@503.94,307.09 503.94,338.58 511.81,346.46 569.54,346.46 578.74,337.26 IC2.3@578.74,305.12 ; D6.A@521.63,553.13 525.4,549.37 525.4,504 520.6,499.2 520.5,499.2 513.42,492.13 332.68,492.13 L2.2@332.68,467.52 ; C45.2@330.33,399.63 332.68,401.97 L2.2@332.68,467.52
  Top Layer w10: 129,529.8 129,751 173.28,795.28 C55.1@183.27,795.28
A+/H1: C67.1 R71.2 R74.2 U8.44 | length 292.5
  Bottom Layer w5: U8.44@352.36,539.96 352.36,446.64 358,441 363.03,435.97 376.04,435.97 448.04,435.97 R71.2@466.75,417.26
  Bottom Layer w11.81: R71.2@466.75,417.26 C67.1@503.06,417.26 R74.2@539.37,417.26
ADC_VBAT: R3.1 U8.22 | length 2057.8
  Signal Layer 3 w5: v3(450.65,812.89) 419.05,844.5 257.6,844.5 207.55,794.45 138.78,794.45 122.9,810.34 122.9,954.6 175.05,1006.75 437.47,1006.75 497.12,1066.4 759.7,1066.4 776.9,1049.2 776.9,676.4 653.5,553 616.11,553 604,540.89 v3(604,409)
  Bottom Layer w5: v3(450.65,812.89) 450.65,806.63 U8.22@450.79,806.5 ; v3(604,409) 604.2,408.8 701.13,408.8 R3.1@701.53,409.2
B+/H2: C68.1 R72.2 R75.2 U8.45 | length 203.7
  Bottom Layer w5: U8.45@332.68,539.96 332.68,444.41 C68.1@357.83,419.26
  Bottom Layer w11.81: C68.1@357.83,417.26 R72.2@394.14,417.26 R75.2@430.45,417.26
BEMF1: R4.1 R57.1 U8.12 | length 795.7
  Signal Layer 3 w7.87: v3(259.45,816.64) 259.45,676.63 217.82,635 163,635 143,615 143,550 169,524 294.66,524 v3(371.33,447.33)
  Bottom Layer w7.87: R4.1@196.85,911.02 196.85,891.22 248.62,839.45 248.62,814.69 ; U8.12@248.62,781.5 248.62,814.69 ; v3(259.45,816.64) 259.45,816.92 250.85,816.92 248.62,814.69 ; v3(371.33,447.33) R57.1@371.33,462.2
BEMF2: R11.1 R58.1 U8.17 | length 888.9
  Signal Layer 3 w7.87: v3(366,830) 366,655.37 332.33,621.7 169.02,621.7 157.4,610.08 157.4,559.3 179.87,536.83 307.87,536.83 v3(396.6,448.1)
  Bottom Layer w7.87: U8.17@352.36,806.5 352.36,828.61 ; v3(366,830) 353.51,830 353.51,829.76 352.36,828.61 ; R11.1@377.95,913.39 377.95,873.44 352.36,847.85 352.36,828.61 ; v3(396.6,448.1) 407.84,459.34 R58.1@411,459.34
BEMF3: R12.1 R59.1 U8.24 | length 1174.1
  Signal Layer 3 w5: v3(469.67,462.33) 458.6,473.4 458.6,536.4 444,551 204.5,551 180.79,574.71 180.79,594.29 187.8,601.3 577.3,601.3 591,615 591,696.21 572.44,714.77 v3(572.44,816.56)
  Bottom Layer w5: R59.1@446.13,462.2 469.67,462.2 v3(469.67,462.33) ; U8.24@490.16,806.5 490.16,828.43 500.31,838.58 R12.1@572.44,838.58 v3(572.44,816.56)
Curr_fdbk1_OPAmp+: R64.1 R67.1 R80.2 U8.9 | length 389.5
  Bottom Layer w7.87: R80.2@94.08,758.53 R64.1@94.08,792.65 R67.1@94.08,826.77 94.08,853.92 120.73,880.58 168.03,880.58 205.77,842.83 205.77,735.18 218.5,722.44 U8.9@248.62,722.44
Curr_fdbk1_OPAmp-: JP1.1 U8.11 | length 665.6
  Bottom Layer w7.87: JP1.1@122.05,1194.91 122.05,1210.95 112.53,1220.47 75.76,1220.47 35.43,1180.15 35.43,1070.87 116.14,990.16 116.14,920.59 138.29,898.45 166.86,898.45 217.58,847.73 217.58,774.55 230.31,761.81 U8.11@256.8,761.81
Curr_fdbk2_OPAmp+: R65.1 R69.1 R81.2 U8.15 | length 191.9
  Bottom Layer w7.87: R65.1@274.02,911.42 274.02,946.85 274.02,982.68 R69.1@275.59,984.25 ; R65.1@275.59,909.45 275.59,870.74 312.99,833.34 U8.15@312.99,806.5
Curr_fdbk2_OPAmp-: JP2.1 U8.13 | length 510
  Bottom Layer w5: U8.13@273.62,806.5 273.62,847.23 256.16,864.69 256.16,900.81 256.16,1052.51 309.59,1105.94 309.59,1173.23 353.86,1217.5 388.46,1217.5 393.7,1212.27 JP2.1@393.7,1202.98
Curr_fdbk3_OPAmp+: R66.1 R70.1 R82.2 U8.16 | length 194.2
  Bottom Layer w7.87: R70.1@307.09,988.19 304.72,985.83 R70.1@304.72,984.25 R82.2@304.72,946.85 304.72,911.42 304.72,881.21 304.72,862.24 332.68,834.29 U8.16@332.68,806.5
Curr_fdbk3_OPAmp-: JP3.1 U8.19 | length 647.3
  Bottom Layer w5: U8.19@391.73,806.5 391.73,898.71 401.57,908.55 401.57,1024.02 415.1,1037.54 455.69,1037.54 507.87,1089.72 507.87,1203.9 524.45,1220.47 648.53,1220.47 658.48,1210.52 JP3.1@658.48,1194.06